# Altium PCB corePCB.PcbDoc (part 2 of 3)
Units mil, origin at the board's own origin, x right, y up, seen from the top; angles counter-clockwise.
Board outline 3543.31 x 3543.31 mil, 4 copper layers (Top Layer, Layer 1, Layer 2, Bottom Layer), stack 23.756 mil thick; 90 components, 166 nets, 640 pads, 472 vias.
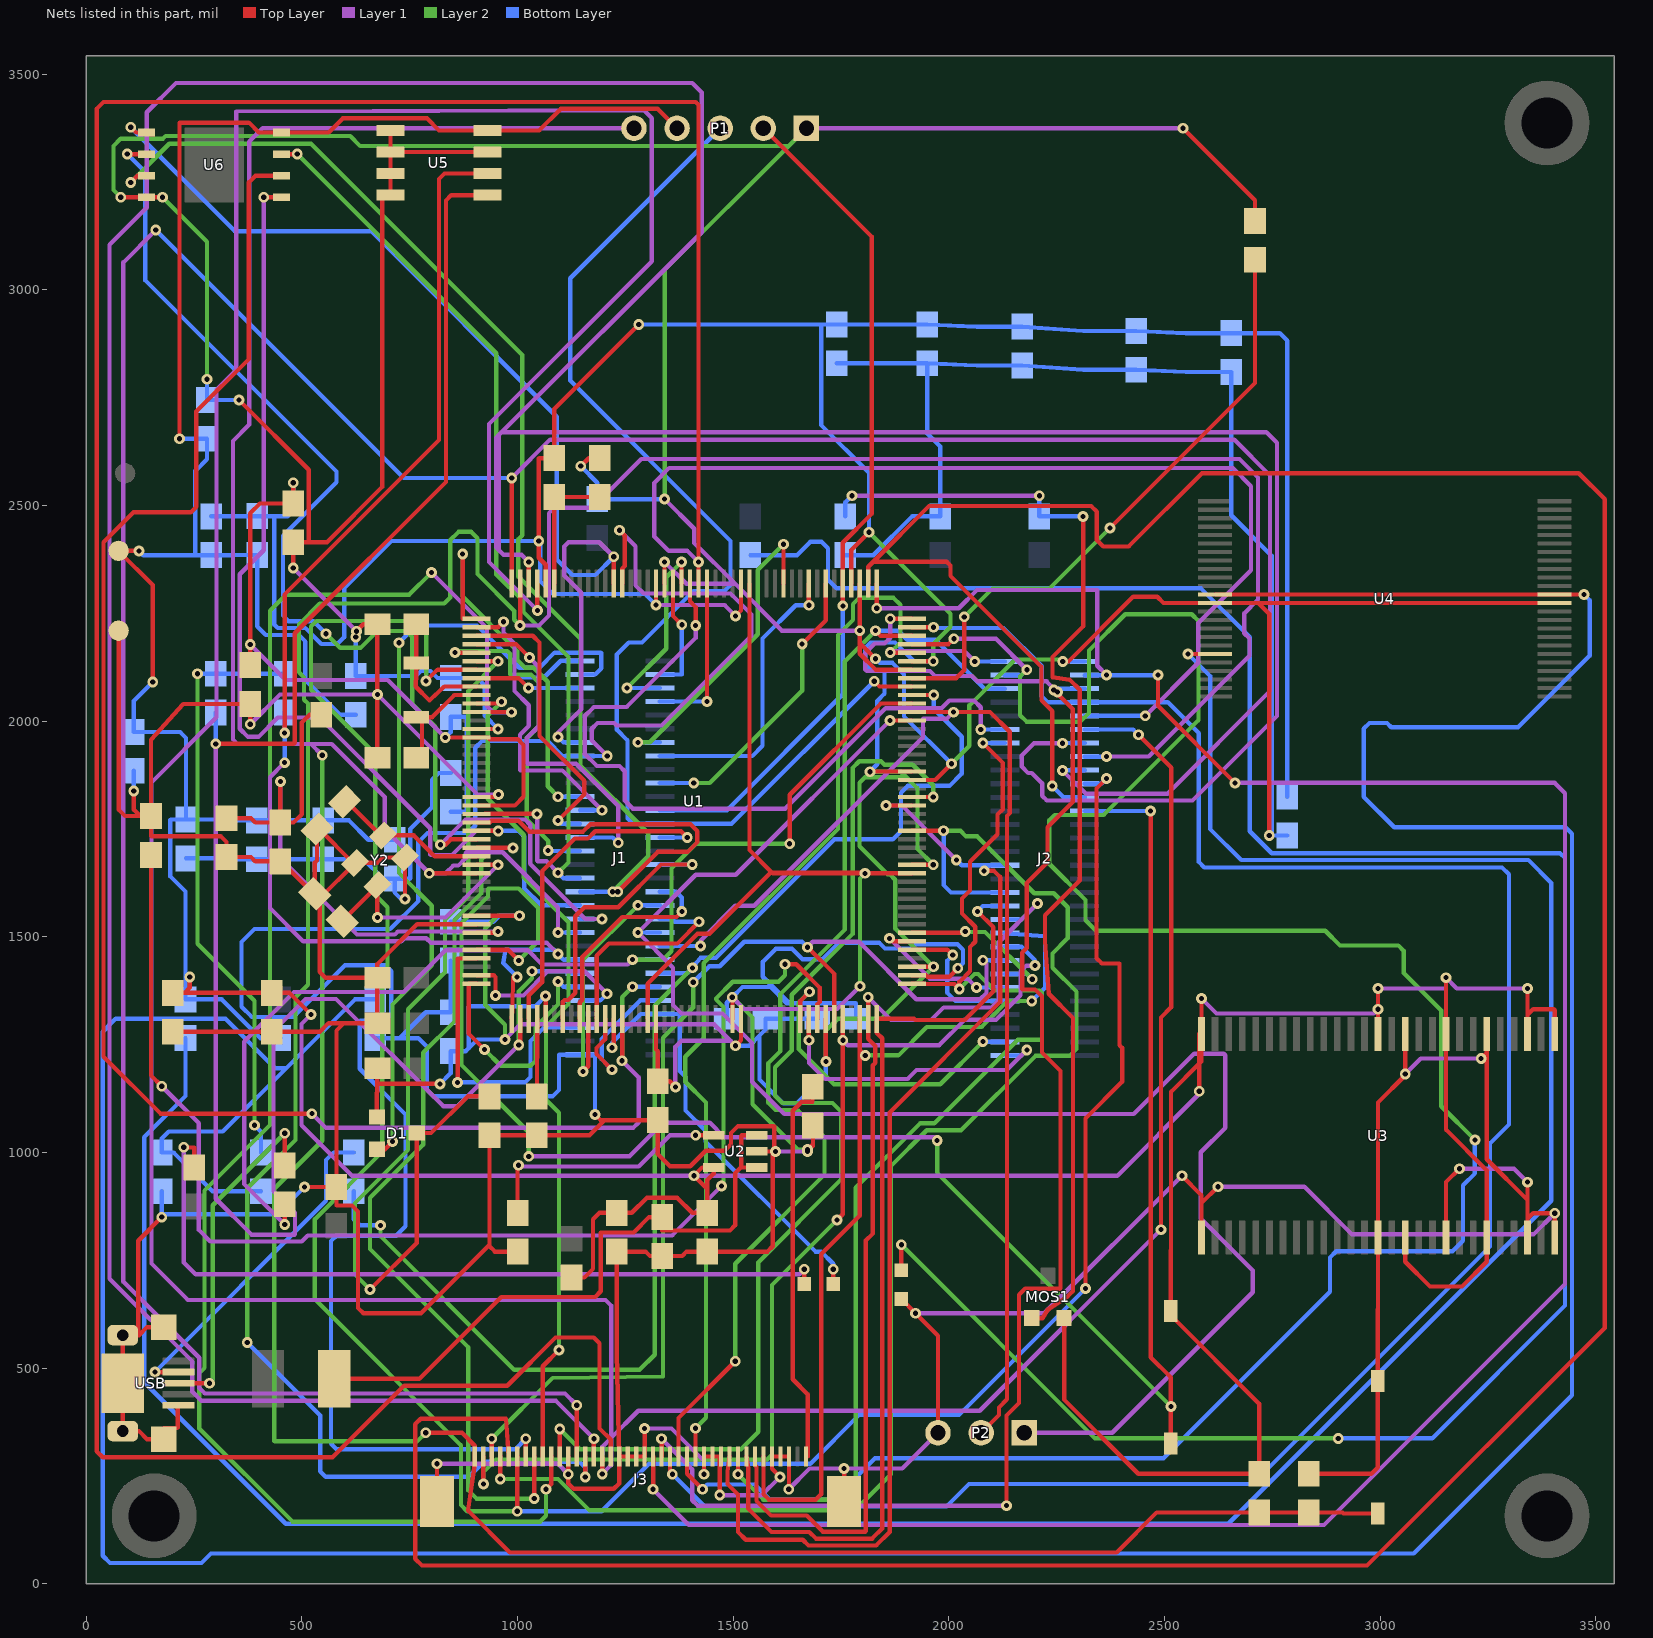
[diagram p4: the nets of this part, all layers, seen from the top]

## Via types
v1: diameter 25, hole 12, Top Layer to Bottom Layer, 472 vias

## Nets (pads, with @x,y where several pads share a name; then routed paths per layer and width w, separated by ;. In a path a pad name is that pad's centre, name@x,y a point inside that pad or via, vN(x,y) a via of type N, cw(c..) or ccw(c..) an arc to the next point about the centre after c; other vN are vias at no path point) (continued)
GND: C1.2 C2.1 C3.2 C4.1 C5.2 C6.1 C7.1 C8.1 C9.1 C10.1 C11.1 C12.2 C13.1 C14.1 C15.1 C16.1 C17.1 C18.1 C19.1 C20.1 C21.1 C22.1 C23.1 C24.1 C25.1 C26.1 C27.1 C28.1 C29.1 C30.1 C31.1 C32.1 C33.2 C34.2 C35.1 C36.1 C37.1 C38.1 C39.1 C40.1 C41.1 C42.1 C43.1 C44.2 C45.2 GND.1 J1.1 J1.30 J2.31 J3.3 J3.4 J3.5 J3.11 J3.12 J3.13 J3.20 J3.21 J3.22 J3.23 J3.29 J3.A J3.B P1.1 P2.3 PWR.2 R1.2 R4.2 R7.2 R14.1 RST.2 U1.14 U1.22 U1.37 U1.61 U1.71 U1.90 U1.102 U1.113 U1.126 U1.135 U1.148 U1.158 U2.2 U3.6 U3.12 U3.28 U3.41 U3.46 U3.52 U3.54 U4.13 U4.36 U5.1 U5.2 U5.3 U5.4 U5.7 U6.4 USB.5 USB.6 USB.7 USB.8 USB.9 Y2.2 Y2.4 | length 36529.7
  Top Layer w10: GND.1@75,2210 75,1795 90,1780 125,1780 ; v1(80,3215) U6.4@140,3215 v1(177,3215) ; v1(110,1838) 110,1795 125,1780 ; v1(175.06,850) 120.5,795.44 120.5,576.22 ; USB.9@180,595 140.78,595 122,576.22 120.5,576.22 ; C42.1@200.06,1280 C43.1@430.06,1280 542,1280 561.94,1299.94 597.5,1299.94 ; USB.5@214,413.82 212,413.82 212,362 211,361 180,361 USB.8@180,335 140.78,335 122,353.78 USB.7@84.65,353.78 84.65,409 85,409.35 USB.9@85,465 85,520 84.65,520.35 USB.6@84.65,576.22 120.5,576.22 ; v1(354,2745) 516,2583 516,2416 515,2415 ; v1(380,1993) 380.06,1993.06 C26.1@380.06,2040 225,2040 150.06,1957 C3.2@150.06,1780 ; v1(480,2355) C25.1@480,2415 515,2415 ; v1(506,920) C33.2@580.06,920 ; v1(624.94,2195) 624.94,2207.5 642.37,2224.94 642.5,2224.94 ; v1(626.28,2208.72) 642.5,2224.94 ; C9.1@675,1914.94 v1(675,2062) C8.1@675,2224.94 642.5,2224.94 ; U5.1@705.59,3370 U5.2@705.59,3320 ; v1(739.03,1588) Y2.2@739.03,1684.03 687.53,1684.03 675,1671.5 Y2.4@623.5,1671.5 ; J3.B@813.4,190.57 v1(813.4,278) ; U1.37@905.3,1529.11 767.11,1529.11 675,1437 C7.1@675,1404.94 ; U1.22@905.3,1824.39 950.39,1824.39 v1(956,1830) ; U1.14@905.3,1981.87 954.87,1981.87 v1(955,1982) ; U5.7@930,3320 U5.2@705.59,3320 ; C30.1@1000.06,770 947.44,770 934.94,782.5 934.94,786 ; J3.29@1117.52,295 v1(1117.52,254) 1117.52,232.5 1130.02,220 1223.13,220 1235.63,232.5 J3.23@1235.63,295 ; v1(1146.47,2591.47) 1165,2610 R4.2@1190.13,2610 ; v1(1179.52,1087.98) 1192.5,1075 1202,1075 ; v1(1294.69,360) J3.20@1294.69,295 J3.21@1275,295 J3.22@1255.32,295 J3.23@1235.63,295 ; U1.61@1301.58,1310 1301.58,1391.08 1417.5,1507 1445,1507 1588.5,1650.5 ; U1.158@1340.95,2319.09 v1(1340.95,2369.07) ; v1(1432.48,253.88) J3.13@1432.48,295 J3.12@1452.17,295 J3.11@1471.85,295 1471.85,287.66 1468.72,287.66 v1(1468.72,205.38) ; v1(1498,1360) 1498.43,1359.57 U1.71@1498.43,1310 ; U1.148@1537.8,2319.09 1537.8,1701.2 1588.5,1650.5 ; U2.2@1555,1002.4 v1@1591,1002.4 ; v1(1608.71,247.63) 1589.96,266.38 J3.5@1589.96,295 J3.4@1609.65,295 J3.3@1629.33,295 1629.33,219.33 v1(1629,219) ; v1(1672.4,1002.4) 1685,1015 ; v1(1672.5,1002.4) 1685,1014.9 1685,1015 ; v1(1672.5,1006.65) 1685,1019.15 ; C28.1@1685,1062.4 1685,1019.15 ; J3.A@1757.28,190.57 v1(1757.28,267) ; U1.135@1793.7,2319.09 v1(1793.7,2210) 1793.7,2181.3 ; v1(1830,2145) 1793.7,2181.3 ; PWR.2@1890,660 v1(1923,627) 1975,575 P2.3@1975,350 ; U1.90@1914.39,1411 1947,1411 1950.82,1407.19 2001.19,1407.19 v1(2021,1427) ; U1.113@1914.39,1863.76 1968.5,1863.76 v1(2006,1901.26) ; U1.126@1914.39,2119.67 1830.33,2119.67 1793.7,2156.3 1793.7,2181.3 ; v1(2264.08,2138.43) 2277.43,2138.43 2427.5,2288.5 2483.55,2288.5 2498,2274.05 U4.13@2617.6,2274.05 2717.5,2274.05 ; v1(2540.5,946) 2586.06,900.44 2586.06,882.5 ; v1(2543,3375) 2710.06,3207.94 C5.2@2710.06,3160 ; U3.28@2586.06,802.56 2586.06,882.5 ; v1(2623.99,920.43) 2586.06,882.5 ; v1(2743,1735) 2743,2248.55 2717.5,2274.05 ; C12.2@2835.06,255 2980,255 2995,270 RST.2@2995,470 2995,636 2995.51,636.51 U3.41@2995.51,802.56 2995.51,1116.01 3058.5,1179 v1(3058.5,1182.13) U3.12@3058.5,1275 ; U3.46@3152.99,802.56 3152.99,931.38 v1(3184,962.39) ; v1(3234.5,1218) 3247.48,1230.98 ; U3.6@3247.48,1275 3247.48,1230.98 ; U3.52@3341.97,802.56 3341.97,845.94 ; v1(3341.97,931.14) 3341.97,889.89 ; U3.54@3404.96,802.56 v1(3404.96,859) 3355,858.97 3341.97,845.94 ; U4.36@3405,2274.05 2717.5,2274.05 ; 125,1780 C3.2@150.06,1780 ; C3.2@150.06,1780 150.06,1734 151.06,1733 312.06,1733 325.06,1720 C2.1@325.06,1685 382,1685 392,1675 C4.1@450.06,1675 452,1675 527.05,1599.95 C10.1@529.95,1599.95 529.95,1672 535.05,1677.09 C11.1@535.05,1749.95 540,1749.95 618.45,1671.5 Y2.4@623.5,1671.5 ; 515,2415 558,2415 686,2543 686,3220 U5.4@705.59,3220 U5.3@705.59,3270 U5.2@705.59,3320 ; C33.2@580.06,920 580.06,878 581.06,877 616,877 630,863 630,639.5 642.5,627 775.94,627 934.94,786 ; C33.2@580.06,920 580.06,1282.5 597.5,1299.94 ; 597.5,1299.94 C6.1@675,1299.94 C7.1@675,1404.94 ; Y2.4@623.5,1671.5 541.06,1589.07 541.06,1418.87 555,1404.94 C7.1@675,1404.94 ; 934.94,786 C1.2@934.94,1040 R1.2@1044.94,1040 1167,1040 1202,1075 ; 1202,1075 C17.1@1325.06,1075 1325.06,996.44 1353.5,968 1400.5,968 1436.5,1004 1480,1004 1495,1019 1495,1045 1511,1061 1594,1061 1595,1060 1595,1005.4 v1(1598,1002.4) v1@1591,1002.4 ; J3.23@1235.63,295 1230.06,534.57 C31.1@1230.06,770 1297.06,770 1307.06,760 C29.1@1335.06,760 1382,760 1392,770 C32.1@1440.06,770 1579.5,770 1592,782.5 1592,1001.4 v1@1591,1002.4 ; 1588.5,1650.5 1806.01,1648.31 U1.102@1914.39,1647.22 v1(1806,1647.22) 1591.78,1647.22 1588.5,1650.5 ; 1685,1015 1685,1019.15 ; 3247.48,1230.98 3247.48,984.38 3341.97,889.89 ; 3341.97,845.94 3341.97,889.89
  Layer 1 w10: v1(380,1993) 449,2062 v1(675,2062) 907,1830 v1(956,1830) ; v1(480,2355) v1(626.28,2208.72) ; v1(813.4,278) 1093.52,278 v1(1117.52,254) ; v1(1294.69,360) 1357,360 1432.48,284.52 v1(1432.48,253.88) ; v1(1340.95,2369.07) 1391.02,2319 1504,2319 ; v1(1341,2515) 1409.61,2446.39 1409.61,2413.39 1504,2319 ; v1(1468.72,205.38) 1566.46,205.38 v1(1608.71,247.63) ; v1(1498,1360) 1525.46,1332.54 1741.04,1332.54 v1(1794,1385.5) ; v1(1598,1002.4) v1(1672.4,1002.4) v1(1672.5,1002.4) ; v1(1629,219) 1677,267 v1(1757.28,267) 1892,267 P2.3@1975,350 ; P1.1@1670,3375 v1(2543,3375) ; v1(1793.7,2210) 1613,2210 1504,2319 ; v1(1923,627) 2221.5,627 v1(2540.5,946) ; v1(2623.99,920.43) 2824.57,920.43 2935,810 3355.96,810 v1(3404.96,859) ; v1(3058.5,1182.13) 3094.37,1218 v1(3234.5,1218) ; v1(3184,962.39) 3310.72,962.39 v1(3341.97,931.14)
  Layer 2 w10: v1(80,3215) 63,3232 63,3334 80,3351 178,3351 184,3357 612,3357 635,3334 1629,3334 ; v1(177,3215) 280,3112 v1(280,2793) ; v1(1341,2515) 1341,3046 1629,3334 ; v1(1498,1360) 1545,1313 1545,1111.62 1649.97,1006.65 v1(1672.5,1006.65) ; P1.1@1670,3375 1629,3334 ; v1(1794,1385.5) 1794,1635.22 v1(1806,1647.22) ; v1(2006,1901.26) 2047.77,1943.03 2047.77,2036.77 2154,2143 2259.5,2143 v1(2264.08,2138.43)
  Bottom Layer w10: v1(110,1838) C37.1@110,1885 ; v1(175.06,850) v1@175.06,857 ; C36.1@175.06,910 v1@175.06,857 ; C38.1@231.38,1681.93 312,1681.93 313.93,1680 C39.1@394.94,1680 C40.1@549.94,1680 643,1680 688,1635 C41.1@714.94,1635 ; v1(280,2793) 279.94,2792.94 C44.2@279.94,2745 v1(354,2745) ; v1(506,920) 443,857 v1@175.06,857 ; v1(624.94,2195) C45.2@624.94,2105 764.5,2105 776,2116.5 798,2116.5 814.5,2100 C13.1@845.06,2100 906.5,2100 ; C35.1@670.06,1265 727,1265 ; v1(739.03,1588) 730,1588 714.94,1603.06 C41.1@714.94,1635 ; C15.1@844.94,1445 844.94,1384.13 845.06,1384 C16.1@845.06,1325 787,1325 727,1265 ; C14.1@845.06,1880 817.5,1880 802,1864.5 802,1801 751,1750 751,1636 750,1635 C41.1@714.94,1635 ; v1(955,1982) 924,2013 924,2082.5 906.5,2100 ; J1.30@1144.96,2140 1100,2140 1062,2102 906.5,2100 ; v1(1146.47,2591.47) 1184.94,2553 R7.2@1184.94,2515 v1(1341,2515) ; v1(1179.52,1087.98) 1179.52,1226.09 1179,1226.61 J1.1@1144.96,1226.61 1097,1226.61 1096,1225.61 1096,1145 1081,1130 805,1130 790,1145 790,1245 770,1265 727,1265 ; C18.1@1485,1310.06 1485,1347 v1(1498,1360) 1521.5,1383.5 1586.86,1383.5 1624.36,1346 1784,1346 ; C20.1@1740,2830 C21.1@1949.94,2830 ; R14.1@1760.06,2385 1825,2385 1915,2475 C34.2@1980.06,2475 1980.06,2637 1949.94,2667.13 C21.1@1949.94,2830 ; C19.1@1785,1309.94 1785,1345 1784,1346 ; v1(1830,2145) 1839.69,2135.31 1869.51,2135.31 1896,2108.82 1896,2011.26 v1(2006,1901.26) ; v1(2021,1427) 2033,1439 2033,1470 2020,1483 1924,1483 1914,1473 1852,1473 1839,1486 1745,1486 1707,1448 1660.78,1448 1636.28,1472.5 1599,1472.5 1568.5,1442 1568.5,1407.5 1629.84,1346.16 1783.84,1346.16 1784,1346 ; v1(2264.08,2138.43) J2.31@2315.04,2138.43 ; v1(2743,1735) v1@2749,1735 ; C27.1@2785,1735 v1@2749,1735 ; C21.1@1949.94,2830 2065,2825 C22.1@2170,2825 2312,2815 C23.1@2434.94,2815 2550,2810 C24.1@2655,2810 2655,2477.41 2749,2383.41 v1@2749,1735
IIC_SCL: J1.8 R20.1 U1.45 U5.6 | length 3101.8
  Top Layer w10: v1(459.94,1972.5) 459.94,2293.94 818,2652 818,3257.5 830.5,3270 U5.6@930,3270 ; U1.45@986.61,1310 988.5,1335.11 989.5,1407 v1(999.11,1407)
  Layer 1 w10: v1(459.94,1903.94) 426,1870 426,1566.63 503.13,1489.5 730.5,1489.5 737.5,1496.5 788.5,1496.5 799.07,1485.93 1068.07,1485.93 v1(1094,1460)
  Bottom Layer w10: v1(459.94,1903.94) v1(459.94,1972.5) R20.1@459.94,2020 ; v1(999.11,1407) 966.67,1439.44 972.11,1470 1084,1470 v1(1094,1460) 1106.91,1447.09 J1.8@1144.96,1447.09
IIC_SDA: J1.7 R21.1 U1.46 U5.5 | length 4647
  Top Layer w10: v1(300.06,1947.5) 480.94,1947.5 483.44,1950 483.44,2204 834,2554.56 834,3207.5 846.5,3220 U5.5@930,3220 ; v1(1003,1249) 1006.3,1252.3 U1.46@1006.3,1310
  Layer 1 w10: v1(300.06,1947.5) 300.06,892.44 383,809.5 483,809.5 484,810.5 484,860 434,910 434,1281.5 508.5,1356 579,1356 827.5,1107.5 861.5,1107.5 v1(1003,1249)
  Layer 2 w10: v1(1003,1249) 1003,1373.39 1033.5,1403.89 v1(1033.5,1420)
  Bottom Layer w10: v1(300.06,1947.5) R21.1@300.06,2020 ; v1(1033.5,1420) 1113.09,1420 1117.5,1415.59 J1.7@1144.96,1415.59
JTCK: J1.42 P1.2 U1.137 | length 1980
  Top Layer w10: P1.2@1570,3375 1821.06,3123.94 1821.06,2480.73 1754.33,2414 U1.137@1754.33,2319.09 v1(1754.33,2267.5)
  Bottom Layer w10: J1.42@1330,1793.54 1485.54,1793.54 1754.33,2062.33 v1(1754.33,2267.5)
JTMS: J1.43 P1.3 U1.124 | length 2885.2
  Top Layer w10: v1(1827,2092.8) 1839.5,2080.3 U1.124@1914.39,2080.3
  Bottom Layer w10: P1.3@1470,3375 1122,3027 1122,2790 1494,2418 1494,2316 1480,2302 1408,2302 1288.5,2182.5 1258,2182.5 1230,2154.5 1230,1980.53 1255,1955.53 1255,1774.55 1267.5,1762.05 J1.43@1330,1762.05 1496.25,1762.05 v1(1827,2092.8)
KEY0: J1.6 U1.44 | length 587.1
  Top Layer w10: U1.44@905.3,1391.32 886.5,1391.32 886.5,1275.5 v1(923.5,1238.5)
  Layer 2 w10: v1(923.5,1238.5) 961,1201 1030,1201 1042.5,1213.5 1042.5,1291.5 1094,1343 v1(1094,1396.5)
  Bottom Layer w10: v1(1094,1396.5) 1106.41,1384.09 J1.6@1144.96,1384.09
KEY1: J1.5 U1.43 | length 460.5
  Top Layer w10: U1.43@905.3,1411 945,1411 949,1407 v1(949,1364)
  Layer 1 w10: v1(949,1364) 1013.61,1364 1069.61,1420 1155.5,1420 v1(1207.5,1368)
  Bottom Layer w10: J1.5@1144.96,1352.6 1192.1,1352.6 v1(1207.5,1368)
KEY2: J1.28 U1.8 | length 249.2
  Top Layer w10: U1.8@905.3,2099.98 1002.48,2099.98 v1(1025.45,2077.01)
  Bottom Layer w10: v1(1025.45,2077.01) J1.28@1144.96,2077.01
LCD_B3: J2.35 J3.24 U1.154 | length 9635.8
  Top Layer w10: J3.24@1215.95,295 1215.95,334.05 1190,360 1190,557.5 1176.5,571 1088,571 976,459 737,459 571,293 38,293 24,307 24,3420 40,3436 1413,3436 1419.69,3429.31 v1(1419.69,2369.07) U1.154@1419.69,2319.09
  Layer 1 w10: v1(1419.69,2369.07) 1393.76,2395 1350.5,2395 1317,2428.5 1317,2552.46 1351.54,2587 2659,2587 2701,2545 2701,2350.3 2578.5,2227.8 2578.5,2135.38 v1(2455.56,2012.44)
  Bottom Layer w10: J2.35@2315.04,2012.44 v1(2455.56,2012.44)
LCD_B4: J2.36 J3.25 U1.173 | length 9562.9
  Top Layer w10: U1.173@1045.67,2319.09 1045.67,2257.33 v1(1046,2257) ; v1(1196.26,254.26) J3.25@1196.26,295 ; v1(2440,1968.44) 2516,1892.44 2516,1337 2492,1313 v1(2492,821)
  Layer 1 w10: v1(1046,2257) 934,2369 934,2689.25 1311,3066.25 1311,3398.5 1292.5,3417 348,3414 348,2815 302,2769 302,2009 151,1858 151,742.5 235.5,658 1204,658 1217,645 1217,338 ; v1(2492,821) 2072,401 1280,401 1217,338 ; 1217,338 1217,275 v1(1196.26,254.26) 1196.26,317.26 1217,338
  Bottom Layer w10: J2.36@2315.04,1980.94 2427.5,1980.94 v1(2440,1968.44)
LCD_B5: J2.37 J3.26 U1.174 | length 10440.5
  Top Layer w10: U1.174@1025.99,2319.09 v1(1025.99,2369.07) ; J3.26@1176.58,295 1176.58,335.58 v1(1177,336)
  Layer 1 w10: v1(1025.99,2369.07) 1009.06,2386 967.5,2386 957.06,2396.44 ; v1(1177,336) 1089,424 267,424 246,445 246,515 54,707 54,3105 140,3191 140,3412 208,3480 1405,3480 1427,3458 1427,3134 963,2670 ; v1(2264,1949) 2197.5,1949 2169,1920.5 2169,1895 2184,1880 2192.5,1880 2216.5,1856 2216.5,1826.96 2227.49,1815.97 2564.97,1815.97 2761,2012 2761,2645.5 2736.5,2670 963,2670 ; 957.06,2396.44 957.06,2664.06 ; 957.06,2396.44 950,2403.5 950,2657 957.06,2664.06 ; 957.06,2664.06 963,2670 ; 957.06,2664.06 957.06,2664.56 962.5,2670 963,2670
  Bottom Layer w10: v1(2264,1949) 2264.45,1949.45 J2.37@2315.04,1949.45
LCD_B6: J2.38 J3.27 U1.175 | length 6677.4
  Top Layer w10: v1(1006,2222) 1006.3,2222.3 U1.175@1006.3,2319.09 ; J3.27@1156.89,295 1156.89,247.33 v1(1157,247.22)
  Layer 1 w10: v1(1006,2222) 1050,2222 1073,2245 1073,2482.5 1085.5,2495 1174,2495 1287,2608 2674,2608 2717,2565 2717,2282 2685,2250 2685,2204 2697.5,2191.5 2697.5,2152 2463.5,1918 v1(2366,1918)
  Layer 2 w10: v1(373.22,559.22) 373.22,917.22 485,1029 485,1360 514,1389 514,2041 505,2050 505,2101.56 493.06,2113.5 493.06,2224.56 541.5,2273 830,2273 844,2287 844,2420 863,2439 892.5,2439 907,2424.5 907,2341.22 992.52,2255.7 992.52,2235.48 v1(1006,2222)
  Bottom Layer w10: v1(373.22,559.22) 542.5,389.94 542.5,260.5 555,248 887,248 922,283 1144,283 1157,270 v1(1157,247.22) ; J2.38@2315.04,1917.95 v1(2366,1918) v1(2366,1918)
LCD_B7: J2.39 J3.28 U1.176 | length 8091.1
  Top Layer w10: U1.176@986.61,2319.09 986.61,2415.39 v1(986.61,2564) ; J3.28@1137.21,295 v1(1137.21,413.79)
  Layer 1 w10: v1(161,3139) 86,3064 86,700 262,524 262,454 275,441 1110,441 v1(1137.21,413.79) ; v1(986.61,2564) 1075.61,2653 2662,2653 2745,2570 2745,2070 2506.97,1831.97 2318.03,1831.97 v1(2264,1886)
  Bottom Layer w10: v1(161,3139) 736,2564 v1(986.61,2564) ; v1(2264,1886) 2264.46,1886.46 J2.39@2315.04,1886.46
LCD_BL: J1.23 J3.34 U1.163 | length 4831.5
  Top Layer w10: v1(1019,336) 1019.1,335.9 J3.34@1019.1,295 ; v1(1236.23,2443) 1248.73,2430.5 1248.73,2359.73 1242.52,2353.52 U1.163@1242.52,2319.09
  Layer 1 w10: v1(1208,1919.53) 1172,1955.53 1172,1982.5 1185.5,1996 1224,1996 1230,1990 1334,1990 1542.5,2198.5 1542.5,2247.5 1494,2296 1292.5,2296 1273.49,2315.01 1273.49,2405.74 v1(1236.23,2443)
  Bottom Layer w10: v1(1019,336) 995,312 580,312 567.5,324.5 567.5,794.5 580,807 718,807 740,829 740,1088 634,1194 634,1305 635,1306 693,1306 707,1320 707,1420 693,1434 600,1434 480,1314 384,1314 360,1338 360,1488 390,1518 705,1518 770,1583 770,1720 791,1741 885.5,1741 902,1757.5 902,1938.5 917.5,1954 1070,1954 1104.47,1919.53 J1.23@1144.96,1919.53 v1(1208,1919.53)
LCD_CLK: J3.30 U1.111 | length 2678.9
  Top Layer w10: J3.30@1097.84,295 1097.84,358.84 v1(1098,359) ; U1.111@1914.39,1824.39 1963.61,1824.39 v1(1964,1824)
  Layer 2 w10: v1(1098,359) 1145,312 1518,312 1558,352 1558,745 1750,937 1750,1095 1730.5,1114.5 1614,1114.5 1597,1131.5 1597,1197.5 1636,1236.5 1636,1365.5 1777,1506.5 1777,1891.5 1792.5,1907 1843,1907 1851,1899 1916.37,1899 1964,1851.37 v1(1964,1824)
LCD_DE: J3.33 U1.28 | length 2092.2
  Top Layer w10: U1.28@905.3,1706.28 989.3,1706.28 v1(989.79,1705.79) ; v1(1038.78,197.25) J3.33@1038.78,295
  Layer 2 w10: v1(989.79,1705.79) 942.5,1705.79 915.5,1678.79 915.5,1600.5 854,1539 854,1304 781,1231 781,1018 658,895 658,776 886,548 886,216.25 905,197.25 v1(1038.78,197.25)
LCD_G2: J2.30 J3.14 U1.128 | length 2738.3
  Top Layer w10: J3.14@1412.8,295 v1(1412.8,360.55) ; v1(1864.41,2159.04) U1.128@1914.39,2159.04
  Layer 1 w10: v1(1864.41,2159.04) 1868.37,2163 2035.67,2163 v1(2060.24,2138.43)
  Layer 2 w10: v1(1412.8,360.55) 1437,384.76 1437,1116 1389,1164 1389,1222 1432,1265 1432,1439 1742.92,1749.92 1742.92,2199.92 1778,2235 1778,2271.5 1792.5,2286 1872,2286 1888,2270 1888,2182.63 v1(1864.41,2159.04)
  Bottom Layer w10: v1(2060.24,2138.43) J2.30@2130,2138.43
LCD_G3: J2.29 J3.15 U1.129 | length 5711
  Top Layer w10: J3.15@1393.11,295 1393.11,254.89 v1(1429,219) ; U1.129@1914.39,2178.72 1999.27,2178.72 v1(2011.77,2191.22)
  Layer 1 w10: v1(2011.77,2191.22) 2109.28,2191.22 v1(2181,2119.5)
  Layer 2 w10: v1(2181,2119.5) 2165,2103.5 2165,2014 2180,1999 2305,1999 2325,2019 2325,2164 2409,2248 2563.5,2248 2579,2232.5 2579,2002.5 2359,1782.5 2245.5,1782.5 2233,1770 2233,1669.5 2317,1585.5 2317,1538.5 2341.5,1514 2873,1514 2907,1480 3042.5,1480 3055,1467.5 3055,1416 3142,1329 3142,1107 v1(3220,1029)
  Bottom Layer w10: v1(1429,219) 1440,230 1550,230 1585,195 1733,195 1829,291 2498,291 2884.02,677.02 2884.02,756.5 2898.52,771 3168,771 3192.48,795.48 3192.48,924 3220,951.52 v1(3220,1029) ; J2.29@2130,2106.93 2168.43,2106.93 v1(2181,2119.5)
LCD_G4: J2.28 J3.16 U1.130 | length 2687.7
  Top Layer w10: J3.16@1373.43,295 1373.43,384.43 v1(1505,516) ; v1(1830,2210) 1841.59,2198.41 U1.130@1914.39,2198.41
  Layer 2 w10: v1(1505,516) 1505,741.97 1712,948.97 1712,1036 1649.5,1098.5 1598,1098.5 1581,1115.5 1581,1206.5 1609.54,1235.04 1609.54,1367.45 1759,1516.91 1759,2139 v1(1830,2210)
  Bottom Layer w10: v1(1830,2210) 1882.91,2210 1903.91,2189 1969,2189 2082.57,2075.43 J2.28@2130,2075.43
LCD_G5: J2.34 J3.17 U1.131 | length 4939.1
  Top Layer w10: J3.17@1353.74,295 1353.74,259.26 v1(1359,254) ; U1.131@1914.39,2218.09 v1(1964.37,2218.09)
  Bottom Layer w10: v1(1359,254) 1434,179 1995,179 2047,231 2704,231 3255,782 3255,1021 3299,1065 3299,1644.99 3282.99,1661 2592.5,1661 2580,1673.5 2580,1972 2508.06,2043.94 J2.34@2315.04,2043.94 2229.06,2043.94 2215.5,2057.5 2215.5,2127.5 2127,2216 1966.46,2216 v1(1964.37,2218.09)
LCD_G6: J2.33 J3.18 U1.132 | length 3815.5
  Top Layer w10: J3.18@1334.06,295 v1(1334.06,336) ; v1(1864.41,2237.78) U1.132@1914.39,2237.78 ; v1(2134,181) 2134,390 2163,419 2163,670 2177,684 2258,684 2259,685 2259,1189 2216,1232 2216,1362 2200,1378 2171,1378 2170,1379 2170,1463 2181,1474 2181,1625 2229,1673 2229,1754 2287.5,1812.5 2287.5,2028.38 v1(2243.44,2072.44)
  Layer 1 w10: v1(1334.06,336) 1405,265.06 1405,193.5 1417.5,181 v1(2134,181) ; v1(1864.41,2237.78) 1864.41,2193.41 1851,2180 1828.5,2180 1806,2157.5 1806,2120 1809.7,2116.3 1956.49,2116.3 1967.79,2105 2053.75,2105 2066.31,2092.44 2226.93,2092.44 v1(2251.93,2067.44)
  Bottom Layer w10: v1(2243.44,2072.44) 2246.43,2075.43 v1@2259.93,2075.43 ; v1(2251.93,2067.44) v1@2259.93,2075.43 ; J2.33@2315.04,2075.43 v1@2259.93,2075.43
LCD_G7: J2.32 J3.19 U1.133 | length 5656.2
  Top Layer w10: v1(1314,219) 1314.37,219.37 J3.19@1314.37,295 ; v1(1833.07,2262) U1.133@1833.07,2319.09 ; v1(2485,2106.93) 2485,2036 v1(2664,1857)
  Layer 1 w10: v1(1314,219) 1397,136 2870,136 3429,695 3429,1833 3405,1857 v1(2664,1857) ; v1(1833.07,2262) 2023,2262 2065.24,2304.24 2344.26,2304.24 2344.26,2128.74 v1(2366,2107)
  Bottom Layer w10: J2.32@2315.04,2106.93 v1@2365.93,2106.93 ; v1(2366,2107) v1@2365.93,2106.93 ; v1(2485,2106.93) v1@2365.93,2106.93
LCD_HSYNC: J3.31 U1.12 | length 3923.5
  Top Layer w10: U1.12@905.3,2021.24 985.52,2021.24 v1(985.76,2021) ; v1(1066,219) 1078.15,231.15 J3.31@1078.15,295
  Layer 1 w10: v1(800.5,2345) 929,2216.5 929,2034.5 942.5,2021 v1(985.76,2021)
  Layer 2 w10: v1(800.5,2345) 749,2293.5 463.5,2293.5 426,2256 426,1063.47 274,911.47 274,500.5 262,488.5 262,360 478,144 1052.5,144 1066,157.5 v1(1066,219)
LCD_R3: J2.10 J3.6 U1.86 | length 2083.9
  Top Layer w10: J3.6@1570.28,295 1570.28,207.5 1582.78,195 1691.5,195 1704,207.5 1704,763.89 1793.7,853.59 1793.7,1237.62 ; U1.86@1793.7,1310 1793.7,1237.62 ; v1(1806.2,1225.12) 1793.7,1237.62
  Layer 2 w10: v1(1806.2,1225.12) 1883.12,1225.12 1949,1291 2076.14,1291 2136.14,1351 v1(2192.5,1351)
  Bottom Layer w10: J2.10@2130,1508.5 2223.25,1501.25 2223.25,1381.75 v1(2192.5,1351)
LCD_R4: J2.11 J3.7 U1.87 | length 2340.1
  Top Layer w10: J3.7@1550.59,295 1550.59,275 1554,271.59 1554,192 1588,158 1670.52,158 1708,120.52 1806.17,120.52 1807.66,122 1807.66,795.66 1824,812 1824,1202 1829.7,1207.7 1829.7,1247 1813.39,1263.32 U1.87@1813.39,1310 1813.39,1359.61 v1(1813,1360)
  Layer 1 w10: v1(1813,1360) 1866,1307 1959,1307 1988,1336 2099.67,1336 2116,1352.33 2116,1487.5 v1(2206,1577.5)
  Bottom Layer w10: J2.11@2130,1540 2168.5,1540 v1(2206,1577.5)
LCD_R5: J2.12 J3.8 U1.88 | length 2226
  Top Layer w10: J3.8@1530.91,295 1534.72,268.18 1534.72,174.23 1588.95,120 1676.52,120 1692,104.52 1822.17,104.52 1845.7,128.05 1845.7,1264.63 1833.07,1277.26 U1.88@1833.07,1310 1919.5,1310 1922.5,1307 2036.84,1307 2103,1373.16 2103,1522.5 v1(2066.5,1559)
  Bottom Layer w10: v1(2066.5,1559) 2079,1571.5 J2.12@2130,1571.5
LCD_R6: J2.24 J3.9 U1.89 | length 2782.5
  Top Layer w10: v1(1511,254) 1511.22,254.22 J3.9@1511.22,295 ; U1.89@1914.39,1391.32 1941.87,1391.32 2013.16,1390.16 v1(2024.5,1378.82) 2024.5,1395.5 2049,1420 2049,1476.32 2061.5,1488.82 2061.5,1523.32 2030.5,1554.32 2030.5,1589 2049,1607.5 2049,1674 2113,1738 2113,1783.5 2125.5,1796 2125.5,1902.95 v1(2079,1949.45)
  Layer 2 w10: v1(1511,254) 1570,195 1771.5,195 1784,207.5 1784,918 1933.5,1067.5 1966.5,1067.5 2160.04,1261.04 2212.04,1261.04 2216,1265 2216,1370 2210.62,1375.38 2106.62,1375.38 2068,1414 2059.68,1414 v1(2024.5,1378.82)
  Bottom Layer w10: v1(2079,1949.45) J2.24@2130,1949.45
LCD_R7: J2.15 J3.10 U1.110 | length 2642.3
  Top Layer w10: J3.10@1491.54,295 1487,260 1487,231 1511,207 1511,120 1529,102 1661.43,102 1674.91,88.52 1831.52,88.52 1863,120 1863,1092.68 2119,1348.68 2119,1639 2105,1653 v1(2082,1653) ; v1(1854.51,1804.71) U1.110@1914.39,1804.71
  Layer 1 w10: v1(1854.51,1804.71) 1891.29,1804.71 v1(2017.52,1678.48)
  Bottom Layer w10: v1(2017.52,1678.48) 2030.02,1665.98 2094.98,1665.98 ; v1(2082,1653) 2094.98,1665.98 ; J2.15@2130,1665.98 2094.98,1665.98
LCD_VSYNC: J3.32 U1.11 | length 1949.6
  Top Layer w10: U1.11@905.3,2040.93 958.93,2040.93 v1(963,2045) ; J3.32@1058.47,295 1058.47,504.47 v1(1096,542)
  Layer 2 w10: v1(963,2045) 931,2013 931,1820 1014.29,1736.71 1014.29,1637.71 1118,1534 1118,1344 1066,1292 1066,1122 1096,1092 v1(1096,542)
LED0: DS0.2 J1.57 U1.57 | length 1045.6
  Top Layer w10: v1(1219,1242.84) 1222.84,1246.67 U1.57@1222.84,1310 ; DS0.2@1731.93,695 v1(1731.93,729.07)
  Bottom Layer w10: v1(1219,1242.84) 1219,1254.5 1285.6,1321.1 J1.57@1330,1321.1 1375,1321.1 1376,1320.1 1376,1189.21 1389.5,1175.71 1389.5,1097.37 1436.5,1050.37 1436.5,1024.5 1691.02,769.98 1704,769.98 1731.93,742.06 v1(1731.93,729.07)
LED1: J1.56 U1.56 | length 394.3
  Top Layer w10: U1.56@1203.15,1310 1203.15,1262.5 1183,1242.35 1183,1228 v1(1219,1192)
  Bottom Layer w10: v1(1219,1192) 1195.52,1215.48 1195.52,1237 1195,1237.52 1195,1263 1284.6,1352.6 J1.56@1330,1352.6
NetC1_1: C1.1 D1.3 U1.6 | length 2270.6
  Top Layer w10: v1(658,682) 766.26,790.26 D1.3@766.26,1045 799.5,1045 884.5,1130 C1.1@934.94,1130 ; U1.6@905.3,2139.35 954.65,2139.35 v1(955,2139)
  Layer 2 w10: v1(658,682) 623,717 623,883 746,1006 746,1332 832,1418 832,1539.63 886,1593.63 886,2070 v1(955,2139)
NetC2_2: C2.2 C4.2 R2.1 U1.38 | length 1356.8
  Top Layer w10: C2.2@325.06,1775 382,1775 392,1765 C4.2@450.06,1765 ; v1(450.06,1860) C4.2@450.06,1765 ; R2.1@545.06,2015 517.5,2015 499.44,1996.94 499.44,1783.94 480.5,1765 C4.2@450.06,1765 ; U1.38@905.3,1509.43 951.93,1509.43 v1(955,1512.5)
  Layer 1 w10: v1(450.06,1860) 450.06,1683.03 627.6,1505.5 715.5,1505.5 722.5,1512.5 v1(955,1512.5)
NetC3_1: C3.1 U1.81 | length 3021.7
  Top Layer w10: C3.1@150.06,1690 150.06,1178.5 v1(175.06,1153.5) ; v1(1620,1436.5) 1646.5,1436.5 1700.5,1382.5 1700.5,1349 1695.28,1343.78 U1.81@1695.28,1310
  Layer 1 w10: v1(175.06,1153.5) 261,1067.56 261,820 287.5,793.5 499.5,793.5 513.5,807.5 1358.5,807.5 v1(1473,922)
  Layer 2 w10: v1(1473,922) 1477.5,926.5 1477.5,1337.5 1460,1355 1460,1357 1499,1396 1605,1396 1620,1411 v1(1620,1436.5)
NetC5_1: C5.1 U1.125 | length 1437.3
  Top Layer w10: U1.125@1914.39,2099.98 2017.5,2099.98 2036,2118.48 v1(2036,2242) ; v1(2374,2448) 2710.06,2784.06 C5.1@2710.06,3070
  Layer 2 w10: v1(2036,2242) 2101.5,2307.5 2233.5,2307.5 v1(2374,2448)
NetC8_2: C8.2 U1.9 Y1.1 | length 312.5
  Top Layer w10: C8.2@765,2224.94 Y1.1@765,2135 765,2111 764,2079.7 795.7,2048 830,2080.3 U1.9@905.3,2080.3
NetC9_2: C9.2 U1.10 Y1.2 | length 269.2
  Top Layer w10: C9.2@765,1914.94 778.5,1914.94 Y1.2@778.5,2009.02 ; Y1.2@765,2009.02 Y1.2@778.5,2009.02 ; U1.10@905.3,2060.61 853.46,2060.61 801.87,2009.02 Y1.2@778.5,2009.02
NetC10_2: C10.2 U1.30 Y2.1 | length 571
  Top Layer w10: C10.2@593.59,1536.32 593.59,1537 Y2.1@675,1618.41 ; v1(675,1545) Y2.1@675,1618.41 ; Y2.1@675,1620 Y2.1@675,1618.41 ; U1.30@905.3,1666.91 v1(955,1666.91)
  Layer 1 w10: v1(675,1545) 833.09,1545 v1(955,1666.91)
NetC11_2: C11.2 U1.29 Y2.3 | length 359.2
  Top Layer w10: C11.2@598.68,1813.59 604,1813.59 682.06,1735.53 Y2.3@687.53,1735.53 759.06,1735.53 808,1686.59 U1.29@905.3,1686.59
NetC28_2: C28.2 J3.1 | length 909.9
  Top Layer w10: J3.1@1668.7,295 1673,295 1673,439 1638,474 1638,1096.78 1659,1117.78 1684,1117.78 C28.2@1685,1152.4
NetC29_2: C29.2 F1.2 U2.1 U2.3 | length 1487.5
  Top Layer w10: F1.2@575,475 772.06,475 962.06,665 1180,665 1193,678 1193,814 1270,815 1305,850 C29.2@1335.06,850 1335.06,819.5 1335.56,819 1492.5,819 1505,831.5 1505,952.5 1517.5,965 1519.5,965 ; U2.1@1555,965 1519.5,965 ; U2.3@1555,1039.8 1520,1039.8 1518.5,1038.3 1518.5,966 1519.5,965
NetC30_2: C30.2 U2.4 | length 595.5
  Top Layer w10: C30.2@1000.06,860 1000.06,968.26 v1(1002.3,970.5) ; v1(1413,1040) 1413.2,1039.8 U2.4@1455,1039.8
  Layer 1 w10: v1(1002.3,970.5) 1005.3,967.5 1281,967.5 1353.5,1040 v1(1413,1040)
NetC35_2: C35.2 C36.2 R16.1 U4.12 U4.37 | length 9786.7
  Top Layer w10: U4.12@2617.6,2293.74 U4.37@3405,2293.74 v1(3473,2293.74)
  Bottom Layer w10: R16.1@405.06,910 292.5,910 202.5,1000 C36.2@175.06,1000 175.06,1032.5 191.13,1048.56 316.56,1048.56 463,1195 ; C35.2@670.06,1355 623,1355 463,1195 ; v1(3473,2293.74) 3486,2280.74 3486,2152 3320,1986 3026,1986 3016,1996 2975.5,1996 2962,1982.5 2962,1825 3033,1754 3430,1754 3445,1739 3445,437 3078,70 289,70 267,48 55,48 38,65 38,1280 68,1310 323,1310 438,1195 463,1195
NetDS0_1: DS0.1 R10.2 | length 1826.4
  Top Layer w10: v1(226,1012) 250,1011 R10.2@250,965 ; DS0.1@1665,695 v1(1665,729)
  Layer 1 w10: v1(226,1012) 226,745 253.75,717.25 1653.25,717.25 v1(1665,729)
NetMOS1_1: MOS1.1 R13.2 R14.2 | length 2685.8
  Top Layer w10: MOS1.1@2192.6,615.79 2217.5,615.79 2230,636 2276.37,666.86 2288,678.49 2288,1312 2232,1368 2223.25,1490.75 2223.25,1550.25 2303.5,1630.5 2303.5,2072.9 2279.95,2096.45 2240.5,2102.08 2240.5,2148.92 2311.54,2219.96 v1(2311.54,2475)
  Layer 1 w10: v1(1775.56,2523) v1(2210,2523)
  Bottom Layer w10: R14.2@1760.06,2475 1760.06,2507.5 v1(1775.56,2523) ; v1(2210,2523) 2210.06,2522.94 R13.2@2210.06,2475 v1(2311.54,2475)
NetPWR_1: PWR.1 R15.1 | length 5461.1
  Top Layer w10: PWR.1@1890,726.93 v1(1890,786)
  Layer 2 w10: v1(1890,786) 2339,337 v1(2903,337)
  Bottom Layer w10: R15.1@1540.06,2385 1648,2385 1679,2416 1705,2416 1720,2401 1720,2328 1740,2308 2585,2308 2698,2195 2698,1745 2749,1694 3417.5,1694 3429,1682.5 3429,645 3121,337 v1(2903,337)
NetR1_1: R1.1 U1.48 | length 180.3
  Top Layer w10: R1.1@1044.94,1130 1044.94,1219 1045.67,1219.73 U1.48@1045.67,1310
NetR4_1: R4.1 R5.1 U1.171 | length 306
  Top Layer w10: U1.171@1085.04,2319.09 1085.04,2419 R5.1@1085.06,2520 R4.1@1190.13,2520
NetR11_2: R11.2 USB.3 | length 798.1
  Top Layer w10: USB.3@214,465 v1(285.5,465) ; R11.2@460.06,970 v1(460.06,1044.67)
  Layer 2 w10: v1(285.5,465) 293,472.5 293,877.61 v1(460.06,1044.67)
NetR12_2: R12.2 USB.2 | length 782.4
  Top Layer w10: v1(159,491) 159.41,490.59 USB.2@214,490.59
  Bottom Layer w10: v1(159,491) 556,888 556,982.5 573.5,1000 R12.2@620,1000
NetR18_1: R18.1 U4.19 | length 6615.7
  Top Layer w10: v1(2555,2156) 2555.06,2155.94 U4.19@2617.6,2155.94
  Bottom Layer w10: R18.1@230.06,1265 230.06,1131.13 134.5,1035.56 134.5,467 462.5,139 2648,139 3397,888 3397,1625 3344,1678 2678,1678 2606,1750 2606,2105 v1(2555,2156)
NRF_CE: J2.25 U1.155 | length 1779.8
  Top Layer w10: U1.155@1400,2319.09 1400,2278 1413,2265 v1(1413,2222)
  Layer 1 w10: v1(1413,2222) 1413,2193 1253,2033 1177,2033 1156,2012 1156,1924 1184,1896 1236.5,1896 1248.52,1883.98 1248.52,1815.98 1267.5,1797 1620.5,1797 1853.5,2030 1983,2030 2001,2048 2058.5,2048 2074,2032.5 v1(2074,1980.94)
  Bottom Layer w10: v1(2074,1980.94) J2.25@2130,1980.94
NRF_CS: J1.34 U1.153 | length 383
  Top Layer w10: v1(1439.37,2045.51) U1.153@1439.37,2319.09
  Bottom Layer w10: J1.34@1330,2045.51 v1(1439.37,2045.51)
PA0: J2.42 U1.40 WKUP.1 | length 4571.8
  Top Layer w10: U1.40@905.3,1470.06 977.94,1470.06 v1(1003,1445) ; v1(2468,1791.97) 2468,525 2515,478 v1(2515,410.76) WKUP.1@2515,325
  Layer 1 w10: v1(1026,991) 1259.5,991 1337.5,1069 1446,1069 1480,1035 1966,1035 v1(1973,1028)
  Layer 2 w10: v1(1003,1445) 1048,1490 1048,1567 1003,1612 932.5,1612 931.5,1611 931.5,1593.38 870,1531.88 870,1203 1026,1047 v1(1026,991) ; v1(1973,1028) 1973,952.76 v1(2515,410.76)
  Bottom Layer w10: J2.42@2315.04,1791.97 v1(2468,1791.97)
PA1: J1.3 U1.41 | length 716.6
  Top Layer w10: v1(861,1162.49) 861,1449.37 U1.41@905.3,1450.37
  Bottom Layer w10: v1(861,1162.49) 1017.5,1162.49 1030,1174.99 1030,1258.28 1061.33,1289.61 J1.3@1144.96,1289.61
PA3: J1.44 U1.47 | length 799.4
  Top Layer w10: U1.47@1025.99,1310 1025.99,1363.86 1057,1394.87 1057,1652 1132.87,1727.87 1163.11,1727.87 1180.24,1745 1379.05,1745 v1(1393.5,1730.55)
  Bottom Layer w10: J1.44@1330,1730.55 v1(1393.5,1730.55)
PA5: J1.46 U1.51 | length 650.4
  Top Layer w10: U1.51@1104.73,1310 1104.73,1349.21 1109,1353.48 1117.5,1353.48 1134,1369.98 1134,1547.57 1155,1568.57 1233.49,1568.57 1332.49,1667.56 v1(1405,1667.56)
  Bottom Layer w10: J1.46@1330,1667.56 v1(1405,1667.56)
PA7: J1.48 U1.53 | length 509.3
  Top Layer w10: U1.53@1144.1,1310 1144.1,1348.1 1150,1354 1150,1453.04 1242.96,1546 1368.42,1546 v1(1381,1558.58)
  Bottom Layer w10: J1.48@1330,1604.57 1367.5,1604.57 1381,1591.07 v1(1381,1558.58)
PA9: J1.51 P2.1 U1.120 | length 3877.5
  Top Layer w10: v1(1863.56,2001.56) U1.120@1914.39,2001.56
  Layer 1 w10: v1(1863.56,2001.56) 1506.06,1644.06 1413.06,1644.06 v1(1279,1510) 1360.5,1428.5 1360.5,1341.68 1380,1322.18 1475.19,1322.18 1543.5,1253.87 1543.5,1164 1618.5,1089 2429,1089 2569.13,1229.13 2637.56,1229.13 2641.06,1225.63 2641.06,1057.06 2584.49,1000.49 2584.49,846.57 2705,726.06 2705,676 2379,350 P2.1@2175,350
  Bottom Layer w10: v1(1279,1510) 1279.08,1510.08 J1.51@1330,1510.08
PA10: J1.52 P2.2 U1.121 | length 2837
  Top Layer w10: U1.121@1914.39,2021.24 v1@2010.76,2021.24 ; v1(2011,2021) v1@2010.76,2021.24 ; P2.2@2075,350 2116.25,391.25 2116.25,408.75 2135,427.5 2135,1780.46 2141.5,1786.96 2141.5,1975.5 2095.76,2021.24 v1@2010.76,2021.24
  Layer 1 w10: v1(1424.08,1478.58) 1424.08,1491.08 1505,1572 1549,1572 1940,1963 1940,2005 1941,2006 1996,2006 v1(2011,2021)
  Bottom Layer w10: J1.52@1330,1478.58 v1(1424.08,1478.58)
PA11: J1.53 R11.1 U1.122 | length 2652.8
  Top Layer w10: v1(460,833) 460.06,833.06 R11.1@460.06,880 ; v1(1631,1716) 1631,1829.43 1842.5,2040.93 U1.122@1914.39,2040.93
  Layer 1 w10: v1(460,833) 366,927 366,1256.5 481.5,1372 736,1372 833,1469 1024,1469 1057,1436 1255.45,1436 v1(1266.54,1447.09)
  Layer 2 w10: v1(1266.54,1447.09) 1337.59,1447.09 1357,1466.5 1357,1659 1414,1716 v1(1631,1716)
  Bottom Layer w10: v1(1266.54,1447.09) J1.53@1330,1447.09
PA12: J1.54 R12.1 U1.123 | length 3093.2
  Top Layer w10: U1.123@1914.39,2060.61 v1(1965,2060.61)
  Layer 2 w10: v1(682,831) 682,806 992.07,495.93 1282.93,495.93 1318,531 1318,1340.09 v1(1406,1428.09)
  Bottom Layer w10: R12.1@620,910 620,845 634,831 v1(682,831) ; J1.54@1330,1415.59 1393.5,1415.59 ; v1(1406,1428.09) 1393.5,1415.59 ; v1(1965,2060.61) 1965,2029 2030,1964 2030,1878.5 2001.5,1850 1905,1850 1889,1834 1889,1745 1870,1726 1734.61,1726 1460.08,1451.47 1424.16,1451.47 1404.95,1428.99 1393.5,1415.59
PB2: J1.55 U1.58 U6.6 | length 4142.8
  Top Layer w10: U6.6@452.99,3265 392.5,3265 377,3249.5 377,2840 255,2718 255,2497 242.5,2484.5 109.5,2484.5 40,2415 40,1222 172,1090 v1(523,1090) ; v1(1242.52,1212.62) U1.58@1242.52,1310
  Layer 1 w10: v1(523,1090) 556,1057 1268,1057 1281,1070 1281,1174.14 v1(1242.52,1212.62)
  Layer 2 w10: v1(1242.52,1212.62) 1242.52,1359.77 v1(1266.84,1384.09)
  Bottom Layer w10: v1(1266.84,1384.09) J1.55@1330,1384.09
PB6: J1.24 U1.164 U6.1 | length 2535.8
  Top Layer w10: v1(103,3377.5) 115.5,3365 U6.1@140,3365 ; U1.164@1222.84,2319.09 1222.84,2381.34 v1(1223,2381.5)
  Layer 1 w10: v1(1094,1963.5) 1094,1974 1148,2028 1148,2298 1108.1,2337.9 1108.1,2405 1118.1,2415 1189.5,2415 v1(1223,2381.5)
  Bottom Layer w10: v1(103,3377.5) 344.5,3136 661,3136 1091,2706 1091,2375 1127,2339 1180.5,2339 v1(1223,2381.5) ; v1(1094,1963.5) 1106.48,1951.02 J1.24@1144.96,1951.02
PB10: J2.2 U1.79 | length 767.3
  Top Layer w10: U1.79@1655.91,1310 1655.91,1351.41 v1(1677,1372.5)
  Layer 2 w10: v1(1677,1372.5) 1652,1347.5 1652,1240 1734,1158 1980,1158 v1(2079,1257)
  Bottom Layer w10: v1(2079,1257) 2079.46,1256.54 J2.2@2130,1256.54
PB11: J2.1 U1.80 | length 707.2
  Top Layer w10: U1.80@1675.59,1310 1675.59,1260.41 v1(1676,1260)
  Layer 1 w10: v1(1676,1260) 1676,1207.5 1713.25,1170.25 1904.5,1170.25 1925.25,1191 2134.46,1191 v1(2181,1237.54)
  Bottom Layer w10: J2.1@2130,1225.04 2168.5,1225.04 v1(2181,1237.54)
PB13: J2.5 U1.93 | length 333.9
  Top Layer w10: U1.93@1914.39,1470.06 1996.75,1470.06 v1(2009.25,1457.56)
  Bottom Layer w10: v1(2009.25,1457.56) 1996.75,1445.06 1996.75,1370 2015.73,1351.02 J2.5@2130,1351.02
PB14: J2.6 U1.94 | length 368.9
  Top Layer w10: v1(1862.77,1496.5) 1869.52,1489.74 U1.94@1914.39,1489.74
  Layer 1 w10: v1(1862.77,1496.5) 1956.21,1403.06 2043.46,1403.06 v1(2064,1382.52)
  Bottom Layer w10: v1(2064,1382.52) J2.6@2130,1382.52
PB15: J2.7 U1.95 | length 394.9
  Top Layer w10: U1.95@1914.39,1509.43 2035.11,1509.43 v1(2038,1512.32)
  Layer 2 w10: v1(2038,1512.32) 2039.07,1511.25 2083.77,1511.25 v1(2193.5,1401.52)
  Bottom Layer w10: J2.7@2130,1414.02 2181,1414.02 v1(2193.5,1401.52)
PC4: J1.49 U1.54 | length 615.5
  Top Layer w10: v1(1152,1188) 1163.78,1199.78 U1.54@1163.78,1310
  Layer 2 w10: v1(1152,1188) 1152,1446 v1(1279,1573)
  Bottom Layer w10: v1(1279,1573) 1279.07,1573.07 J1.49@1330,1573.07
PC5: J1.50 U1.55 | length 510.3
  Top Layer w10: U1.55@1183.47,1310 1183.47,1456.47 1211.7,1484.7 1370.7,1484.7 v1(1421,1535)
  Bottom Layer w10: J1.50@1330,1541.57 1358,1541.57 1364.57,1535 v1(1421,1535)
PC10: J1.40 U1.139 | length 689.7
  Top Layer w10: v1(1660,2179.04) 1714.96,2234 U1.139@1714.96,2319.09
  Layer 2 w10: v1(1408.54,1856.54) 1445.54,1856.54 1660,2071 v1(1660,2179.04)
  Bottom Layer w10: J1.40@1330,1856.54 v1(1408.54,1856.54)
PC12: J1.38 U1.141 | length 686.3
  Top Layer w10: v1(1675.59,2269) U1.141@1675.59,2319.09
  Bottom Layer w10: J1.38@1330,1919.53 1544.6,1919.53 1568,1942.93 1568,2192 1645,2269 v1(1675.59,2269)
PD2: J1.37 U1.144 | length 758.1
  Top Layer w10: U1.144@1616.54,2319.09 1616.54,2410 v1(1617,2410.47)
  Layer 2 w10: v1(1279,1951) 1306.38,1951 1556.96,2201.58 1556.96,2350.43 v1(1617,2410.47)
  Bottom Layer w10: v1(1279,1951) J1.37@1330,1951.02
PE2: J1.20 U1.1 | length 900
  Top Layer w10: v1(872.72,2387.91) 872.72,2237.78 U1.1@905.3,2237.78
  Layer 2 w10: v1(872.72,2387.91) 872.72,2288.9 999.81,2161.82 999.81,2141.69 1017.5,2124 1037.63,2124 1070,2091.63 1070,1849.04 v1(1094,1825.04)
  Bottom Layer w10: v1(1094,1825.04) J1.20@1144.96,1825.04
PE3: J1.19 U1.2 | length 724
  Top Layer w10: U1.2@905.3,2218.09 954.91,2218.09 v1(967.41,2230.59)
  Layer 1 w10: v1(967.41,2230.59) 967.41,2205.59 993,2180 993,2070 1026.17,2036.83 1026.17,1989.21 1005.5,1968.53 1005.5,1887 1006.97,1885.53 1104.01,1885.53 v1(1196,1793.54)
  Bottom Layer w10: J1.19@1144.96,1793.54 v1(1196,1793.54)
PE4: J1.18 U1.3 | length 687.7
  Top Layer w10: U1.3@905.3,2198.41 1035.09,2198.41 1051,2182.5 1051,1966 1155,1862 1155,1830.5 v1(1094,1769.5)
  Bottom Layer w10: v1(1094,1769.5) 1101.45,1762.05 J1.18@1144.96,1762.05
PE5: J1.17 U1.4 | length 832.3
  Top Layer w10: U1.4@905.3,2178.72 996.28,2178.72 v1(1027.5,2147.5)
  Layer 1 w10: v1(1027.5,2147.5) 1048.95,2126.05 1048.95,1988.48 1021.5,1961.03 1021.5,1903 1022.97,1901.53 1135.47,1901.53 1233.5,1803.5 v1(1233.5,1718.05)
  Bottom Layer w10: J1.17@1144.96,1730.55 1221,1730.55 v1(1233.5,1718.05)
PE6: J1.16 U1.5 | length 799.7
  Top Layer w10: v1(855,2159.04) U1.5@905.3,2159.04
  Layer 2 w10: v1(855,2159.04) 858.96,2163 976,2163 983.39,2155.61 983.39,2109 984.39,2108 1031,2108 1048.95,2090.05 1048.95,1987.45 1021.5,1960 1021.5,1771.5 1071,1722 v1(1071,1700.06)
  Bottom Layer w10: v1(1071,1700.06) 1072,1699.06 J1.16@1144.96,1699.06
PF6: J1.14 U1.24 U6.7 | length 2337.5
  Top Layer w10: U6.7@452.99,3315 v1(489,3315) ; U1.24@905.3,1785.02 923.86,1785.02 923.99,1785.15 v1(1045,1785.15)
  Layer 1 w10: v1(1045,1785.15) 1045.49,1784.66 1045.49,1677 1046.94,1675.56 1067.01,1675.56 v1(1094,1648.56)
  Layer 2 w10: v1(489,3315) 950.61,2853.39 950.61,2340.35 1013.48,2277.48 1013.48,2253.52 1118,2149 1118,1672.56 v1(1094,1648.56)
  Bottom Layer w10: v1(1094,1648.56) 1106.5,1636.06 J1.14@1144.96,1636.06
PF7: J1.13 U1.25 U6.3 | length 3480.7
  Top Layer w10: v1(103,3249.5) 118.5,3265 U6.3@140,3265 ; U1.25@905.3,1765.34 936,1765.34 939.82,1769.15 1002,1769.15 1027.15,1744 1152,1744 1169,1761 1401,1761 1417,1745 1417,1720 1394,1697 1325,1697 v1(1232.57,1604.57)
  Layer 2 w10: v1(103,3249.5) 192.5,3339 521,3339 1011,2849 1011,2431 1002,2422 1002,2335 1146,2191 1146,1897 1303,1740 1303,1687 v1(1220.57,1604.57)
  Bottom Layer w10: J1.13@1144.96,1604.57 v1(1220.57,1604.57) v1(1232.57,1604.57)
PF8: J1.12 U1.26 U6.5 | length 2494.9
  Top Layer w10: v1(411.5,3215) U6.5@452.99,3215 ; U1.26@905.3,1745.65 v1(955.28,1745.65)
  Layer 1 w10: v1(411.5,3215) 411.5,2396.5 356,2341 356,1982.5 374.85,1963.65 399.15,1963.65 444,2008.5 541,2008.5 797.5,1752 797.5,1691 798.53,1689.97 847.97,1689.97 903.65,1745.65 v1(955.28,1745.65)
  Bottom Layer w10: v1(955.28,1745.65) 1002.55,1745.65 1015.7,1732.5 1015.7,1612.37 1055,1573.07 J1.12@1144.96,1573.07
PF9: J1.11 U1.27 U6.2 | length 2917.4
  Top Layer w10: v1(95,3315) U6.2@140,3315 ; v1(821,1713.47) 832.92,1713.47 845.42,1725.97 U1.27@905.3,1725.97
  Layer 1 w10: v1(821,1713.47) 879.53,1772 1017.5,1772 1029.49,1760.01 1029.49,1669.24 1157.16,1541.57 v1(1196,1541.57)
  Layer 2 w10: v1(556,2203) 589,2170 636,2170 675,2209 742.5,2209 756,2195.5 756,2040 809,1987 809,1725.47 v1(821,1713.47)
  Bottom Layer w10: v1(95,3315) 137,3273 137,3022 580,2579 580,2554 456,2430 456,2245 469,2232 527,2232 v1(556,2203) ; J1.11@1144.96,1541.57 v1(1196,1541.57)
PG3: J2.13 J3.37 U1.107 | length 3356.5
  Top Layer w10: v1(960,243) v1(960,243) J3.37@960.04,295 ; U1.107@1914.39,1745.65 1987.65,1745.65 v1(1988,1746)
  Layer 2 w10: v1(960,243) 1094,243 1167,170 1782,170 1866,254 1866,968.5 1949,1051.5 2028.5,1051.5 2201,1224 2280,1224 2296,1240 2296,1373 2240.5,1428.5 2240.5,1461.5 2276,1497 2276,1568.5 2243.5,1601 2198,1601 2066,1733 2040,1733 2027,1746 v1(1988,1746)
  Bottom Layer w10: v1(1988,1746) 1988,1619.99 2005,1602.99 J2.13@2130,1602.99
PG13: J1.33 U1.156 | length 470.2
  Top Layer w10: U1.156@1380.32,2319.09 v1(1380.32,2369)
  Layer 2 w10: v1(1254,2077) 1345,2168 1345,2333.68 v1(1380.32,2369)
  Bottom Layer w10: v1(1254,2077) J1.33@1330,2077.01
PG14: J1.32 U1.157 | length 269.7
  Top Layer w10: U1.157@1360.63,2319.09 1360.63,2244 v1(1381,2223.63)
  Bottom Layer w10: J1.32@1330,2108.5 1380.5,2108.5 1381,2109 v1(1381,2223.63)
PH6: J2.8 J3.38 U1.83 | length 2552
  Top Layer w10: J3.38@940.36,295 v1(940.36,336) ; v1(1672.28,1476) 1734.65,1413.63 U1.83@1734.65,1310
  Layer 1 w10: v1(1672.28,1476) 1684.78,1488.5 1791.5,1488.5 1924.68,1355.32 2072.82,1355.32 2087.5,1370 2087.5,1437.01 v1(2079,1445.51)
  Layer 2 w10: v1(940.36,336) 1081.36,477 1337.5,480.5 1337.5,1265.87 1407.63,1336 v1(1407.63,1394.63)
  Bottom Layer w10: v1(1407.63,1394.63) 1444.87,1431.87 1468.87,1431.87 1525.5,1488.5 1659.78,1488.5 v1(1672.28,1476) ; v1(2079,1445.51) J2.8@2130,1445.51
PH7: J2.9 J3.39 U1.84 | length 2510.1
  Top Layer w10: J3.39@920.67,295 920.67,231.83 v1(921,231.5) ; v1(1741,843.5) 1754.33,856.83 v1(1754.33,1260.02) U1.84@1754.33,1310
  Layer 1 w10: v1(1754.33,1260.02) 1765.73,1248.62 1977.62,1248.62 2036.5,1307.5 2109.5,1307.5 2166.43,1364.43 2166.43,1420 2179.69,1433.26 v1(2199.75,1433.26)
  Layer 2 w10: v1(921,231.5) 921,259 950,288 1579,288 1590.09,299.09 1590.09,692.59 v1(1741,843.5)
  Bottom Layer w10: J2.9@2130,1477.01 2168.5,1477.01 2199.75,1445.76 v1(2199.75,1433.26)
PI3: J2.41 J3.36 U1.134 | length 8386.1
  Top Layer w10: J3.36@979.73,295 973.23,382.5 775.5,382.5 763,370 763,57.5 778.5,42 2970,42 3521,593 3521,2515 3461,2575 2587,2575 2417,2405 2358,2405 2343,2420 2343,2486 2330,2499 1954,2499 1825,2370 ; U1.134@1813.39,2319.09 1813.39,2358.39 1825,2370 ; v1(2240,1849.46) 2240,2023.44 2215,2048.44 2215,2126 2004,2337 2004,2361 1995,2370 1825,2370
  Bottom Layer w10: v1(2240,1849.46) 2266,1823.46 J2.41@2315.04,1823.46
PI8: J2.40 J3.35 U1.7 | length 5971.3
  Top Layer w10: v1(788,2093) 814.67,2119.67 U1.7@905.3,2119.67 ; v1(999.41,168) J3.35@999.41,295 ; v1(2317,684.5) 2317,1079 2402,1164 2402,1242.54 2396,1248.54 2396,1437 2395,1438 2355,1438 2342.5,1450.5 2342.5,1843.96 v1(2366,1867.46)
  Layer 2 w10: v1(788,2093) 788,2203.5 759,2232.5 533.5,2232.5 521,2220 521,2073 670,1924 670,1597 698.5,1568.5 698.5,1413 686,1400.5 686,1001 530,845 530,659.74 869,320.74 869,182.5 883.5,168 v1(999.41,168)
  Bottom Layer w10: v1(999.41,168) 1195,168 1305,278 1679,278 1792,391 2023.5,391 v1(2317,684.5) ; J2.40@2315.04,1854.96 2353.5,1854.96 v1(2366,1867.46)
RESET: C12.1 J1.10 J3.40 P1.5 R6.1 RST.1 U1.31 | length 8031.6
  Top Layer w10: v1(787,350) 871,350 900.99,320.01 J3.40@900.99,295 900.99,276 885,169.5 981.98,72.52 2389.52,72.52 2482,165 R6.1@2720.06,165 C12.1@2835.06,165 2913,165 2915.09,162.91 RST.1@2995,162.91 ; v1(795.42,1647.22) U1.31@905.3,1647.22
  Layer 1 w10: v1(547,1921) 520.75,1947.25 ; v1(1094,1510.08) 1094,1567.5 965.5,1696 881.7,1696 879.77,1694.08 879.77,1682.5 862.8,1665.53 851.22,1665.53 832.92,1647.22 v1(795.42,1647.22) 692.28,1750.37 692.28,1824.22 569.25,1947.25 520.75,1947.25 ; P1.5@1270,3375 409,3375 378,3344 378,2688 340,2650 340,1957.5 350.25,1947.25 520.75,1947.25
  Layer 2 w10: v1(547,1921) 547,1027 436,916 436,331 437,330 767,330 v1(787,350)
  Bottom Layer w10: v1(1094,1510.08) J1.10@1144.96,1510.08
VBAT: D1.2 J1.29 | length 1901
  Top Layer w10: D1.2@673.74,1007.6 692.5,1007.6 v1(710,1025.1)
  Layer 2 w10: v1(710,1025.1) 710,1343 801,1434 801,1572.27 725,1648.27 v1(725,2182)
  Bottom Layer w10: v1(725,2182) 765,2222 906,2222 1004,2124 1051,2124 1086,2159 1193,2159 1194,2158 1194,2122.5 1180,2108.5 J1.29@1144.96,2108.5
VCC: R16.2 R20.2 R21.2 | length 1372.9
  Layer 2 w10: v1(258,2110) 258,1484 390,1352 v1(390,1063)
  Bottom Layer w10: v1(258,2110) R21.2@300.06,2110 R20.2@459.94,2110 ; v1(390,1063) 405.06,1047.94 R16.2@405.06,1000
VCC3.3: 3.3V.1 C31.2 C32.2 C37.2 C38.2 C39.2 C40.2 C41.2 C42.2 C43.2 C44.1 C45.1 MOS1.2 P1.4 R6.2 R8.1 R9.1 R17.1 R18.2 R19.1 U2.5 U3.1 U3.3 U3.9 U3.14 U3.27 U3.43 U3.49 U5.8 U6.8 WKUP.2 | length 12942.6
  Top Layer w10: v1(122,2395) 3.3V.1@75,2395 154,2316 v1(154,2091) ; C42.2@200.06,1370 227.5,1370 ; v1(216,2655) 216,3387 217,3388 377,3388 400,3365 U6.8@452.99,3365 562,3365 595,3398 790,3398 818,3370 U5.8@930,3370 1050,3370 1100,3420 1325,3420 P1.4@1370,3375 ; v1(240,1407.13) 240,1382.5 227.5,1370 ; v1(521,1320) 471,1370 C43.2@430.06,1370 227.5,1370 ; R19.1@1125.06,710 1155,710 1175,730 1175,845 1190,860 C31.2@1230.06,860 1265,860 1300,895 1370,895 1405,860 C32.2@1440.06,860 1440.06,914.94 ; MOS1.2@2267.4,615.79 2267.4,427 2439.4,255 R6.2@2720.06,255 2720.06,416.94 2515,622 WKUP.2@2515,632.09 2515,772.5 2515.5,773 2515.5,1140.5 2581,1206 ; v1(2581,1142) 2581,1206 ; v1(2586,1357) 2586.06,1356.94 U3.27@2586.06,1275 ; U3.14@2995.51,1275 v1(2995.51,1332) v1(2995.51,1380.37) ; U3.43@3058.5,802.56 3058.5,746.5 3116,689 3190,689 3247.48,746.48 U3.49@3247.48,802.56 3247.48,958.41 3152.99,1052.89 U3.9@3152.99,1275 v1(3152.99,1405.37) ; U3.3@3341.97,1275 3341.97,1318.94 ; v1(3341.97,1380.37) 3341.97,1318.94 ; U3.1@3404.96,1275 3404.96,1330.01 3403,1331.97 3355,1331.97 3341.97,1318.94 ; 1440.06,914.94 1440.06,935.93 1455,950.87 U2.5@1455,965 1428,965 v1(1409,946) 1440.06,914.94 ; 2581,1206 2581,1275 U3.27@2586.06,1275 ; 2581,1206 2586.06,1211.06 U3.27@2586.06,1275
  Layer 1 w10: v1(521,1320) 499,1298 499,1063 616,946 v1(1409,946) 2391,946 2581,1136 v1(2581,1142) ; v1(2586,1357) 2620.94,1322.06 2985.57,1322.06 v1(2995.51,1332) ; v1(2995.51,1380.37) 3152.99,1380.37 v1(3152.99,1405.37) 3177.99,1380.37 v1(3341.97,1380.37)
  Bottom Layer w10: v1(122,2395) 132,2385 254,2385 ; v1(154,2091) 110,2047 C37.2@110,1975 217.5,1975 231.38,1961.12 C38.2@231.38,1771.93 ; v1(216,2655) C44.1@279.94,2655 279.94,2607.5 253,2580.56 253,2386 254,2385 ; v1(240,1407.13) 230.06,1397.19 ; R17.1@450.06,1265 404,1265 314,1355 R18.2@230.06,1355 230.06,1397.19 ; C45.1@624.94,2015 588,2015 508,2095 508,2184.5 492.5,2200 416.07,2200 396.07,2220 R8.1@396.07,2385.59 342.59,2385.59 342,2385 R9.1@289.94,2385 254,2385 ; C41.2@714.94,1725 654,1725 609,1770 C40.2@549.94,1770 C39.2@394.94,1770 313.93,1770 312,1771.93 C38.2@231.38,1771.93 ; 230.06,1397.19 230.06,1604.94 195,1640 195,1770.93 196,1771.93 C38.2@231.38,1771.93
VCC3.3M: C13.2 C14.2 C15.2 C16.2 C17.2 C18.2 C19.2 C20.2 C21.2 C22.2 C23.2 C24.2 C25.2 C26.2 C27.2 D1.1 R3.2 R5.2 R8.2 R9.2 U1.15 U1.23 U1.36 U1.49 U1.62 U1.72 U1.82 U1.91 U1.103 U1.114 U1.127 U1.136 U1.149 U1.159 U1.172 | length 13451.6
  Top Layer w10: C26.2@380.06,2130 v1(380.06,2178) 380.06,2482.5 402.56,2505 C25.2@480,2505 v1(480,2553) ; D1.1@673.74,1082.4 673.74,1138 675,1139.26 675,1160 ; R3.2@675,1195.06 675,1160 ; v1(820.06,1159) 676,1159 675,1160 ; v1(832.56,1962.19) U1.15@905.3,1962.19 932,1962.19 935.69,1958.5 1000.5,1958.5 1014,1945 1014,1824.89 993.82,1804.71 U1.23@905.3,1804.71 ; U1.36@905.3,1548.8 v1(1004.5,1548.8) ; v1(1065,1362.5) 1065.36,1362.14 U1.49@1065.36,1310 ; U1.172@1065.36,2319.09 1065.36,2362.67 1049,2379.03 v1(1049,2418) 1049,2609 1050,2610 R5.2@1085.06,2610 1085.06,2724.06 v1(1281,2920) ; v1(1321,2269.52) 1321.26,2269.78 U1.159@1321.26,2319.09 ; U1.62@1321.26,1310 1321.26,1238.8 1325.06,1235 C17.2@1325.06,1165 1353,1165 v1(1366,1152) ; v1(1505.61,1247.5) 1518.11,1260 U1.72@1518.11,1310 ; v1(1505.61,2244.11) 1518.11,2256.61 U1.149@1518.11,2319.09 ; v1(1714.96,1211) U1.82@1714.96,1310 ; U1.136@1774.02,2319.09 1774.02,2397.02 v1(1815,2438) ; v1(1817,1883) 1817.45,1883.45 U1.114@1914.39,1883.45 ; U1.91@1914.39,1430.69 v1(1964.37,1430.69) ; U1.103@1914.39,1666.91 v1@1963.91,1666.91 ; U1.127@1914.39,2139.35 1963.65,2139.35 v1(1964,2139) ; v1(1964,1667) v1@1963.91,1666.91 ; v1(1964.09,1666.91) v1@1963.91,1666.91
  Layer 1 w10: v1(380.06,2178) 462.38,2095.68 699.07,2095.68 v1(832.56,1962.19) ; v1(971,1262) 1006,1297 1456.11,1297 1494.11,1259 ; v1(1321,2269.52) 1480.2,2269.52 v1(1505.61,2244.11) ; v1(1366,1152) 1366,1245 1380,1259 1494.11,1259 ; v1(1505.61,1247.5) 1494.11,1259
  Layer 2 w10: v1(971,1262) 971,1296 925,1342 925,1520 953.8,1548.8 v1(1004.5,1548.8) ; v1(1714.96,1211) 1714.96,1282.46 1742.5,1310 1843.68,1310 v1(1964.37,1430.69) 1876,1519.06 1876,1632.5 1863.48,1645.02 1857.98,1645.02 1793,1710 1793,1857.5 1805.5,1870 1901.5,1870 ; v1(1815,2438) 2004,2249 2004,2219 1964,2179 v1(1964,2139) ; v1(1817,1883) 1888.5,1883 1901.5,1870 ; v1(1964.09,1666.91) v1(1964,1667) 1927.25,1703.75 1927.25,1844.25 1901.5,1870
  Bottom Layer w10: R9.2@289.94,2475 342,2475 342.59,2475.59 R8.2@396.07,2475.59 435,2475.59 ; v1(480,2553) 480,2488.09 467.5,2475.59 435,2475.59 ; v1(820.06,1159) 845.06,1184 C16.2@845.06,1235 880,1235 886.5,1241.5 ; v1(832.56,1962.19) 845.06,1974.69 C13.2@845.06,2010 881,2010 882,2009 882,1791 881,1790 C14.2@845.06,1790 ; C15.2@844.94,1535 944,1535 957.8,1548.8 v1(1004.5,1548.8) ; v1(971,1262) 907,1262 886.5,1241.5 ; v1(1065,1362.5) 1041.5,1339 887.5,1339 886.5,1338 886.5,1241.5 ; v1(1281,2920) 1705,2920 ; v1(1321,2269.52) 1295.52,2295 1082.05,2295 1052.98,2324.06 1052.98,2414.02 v1(1049,2418) 707,2418 598,2309 598,2195 582,2179 545,2179 508,2216 444,2216 436,2224 436,2474.59 435,2475.59 ; v1(1505.61,1247.5) 1537.5,1247.5 1561,1271 ; C19.2@1695,1309.94 1634.13,1309.94 1634,1310.06 C18.2@1575,1310.06 1575,1285 1561,1271 ; v1(1714.96,1211) 1714.96,1181.22 1647.52,1113.78 1616.37,1113.78 1561,1169.15 1561,1271 ; v1(1815,2438) 1815,2576 1704,2687 1704,2919 1705,2920 ; v1(1817,1883) 1834,1900 1834,2047 1851,2064 1851,2116 1821.5,2117 1806,2132.5 1806,2170 1818.54,2182.54 1875.46,2182.54 1919,2139 v1(1964,2139) ; C27.2@2785,1825 2785,2882.5 2767.5,2900 C24.2@2655,2900 2550,2900 C23.2@2434.94,2905 2312,2905 C22.2@2170,2915 2065,2915 C21.2@1949.94,2920 C20.2@1740,2920 1705,2920